# Altium PCB LKAS-EPS_PCB_V2I1.PcbDoc (part 1 of 2)
Units mil, origin at the board's own origin, x right, y up, seen from the top; angles counter-clockwise.
Board outline 1667 x 1739 mil, 2 copper layers (Top Layer, Bottom Layer); 50 components, 66 nets, 279 pads, 103 vias.
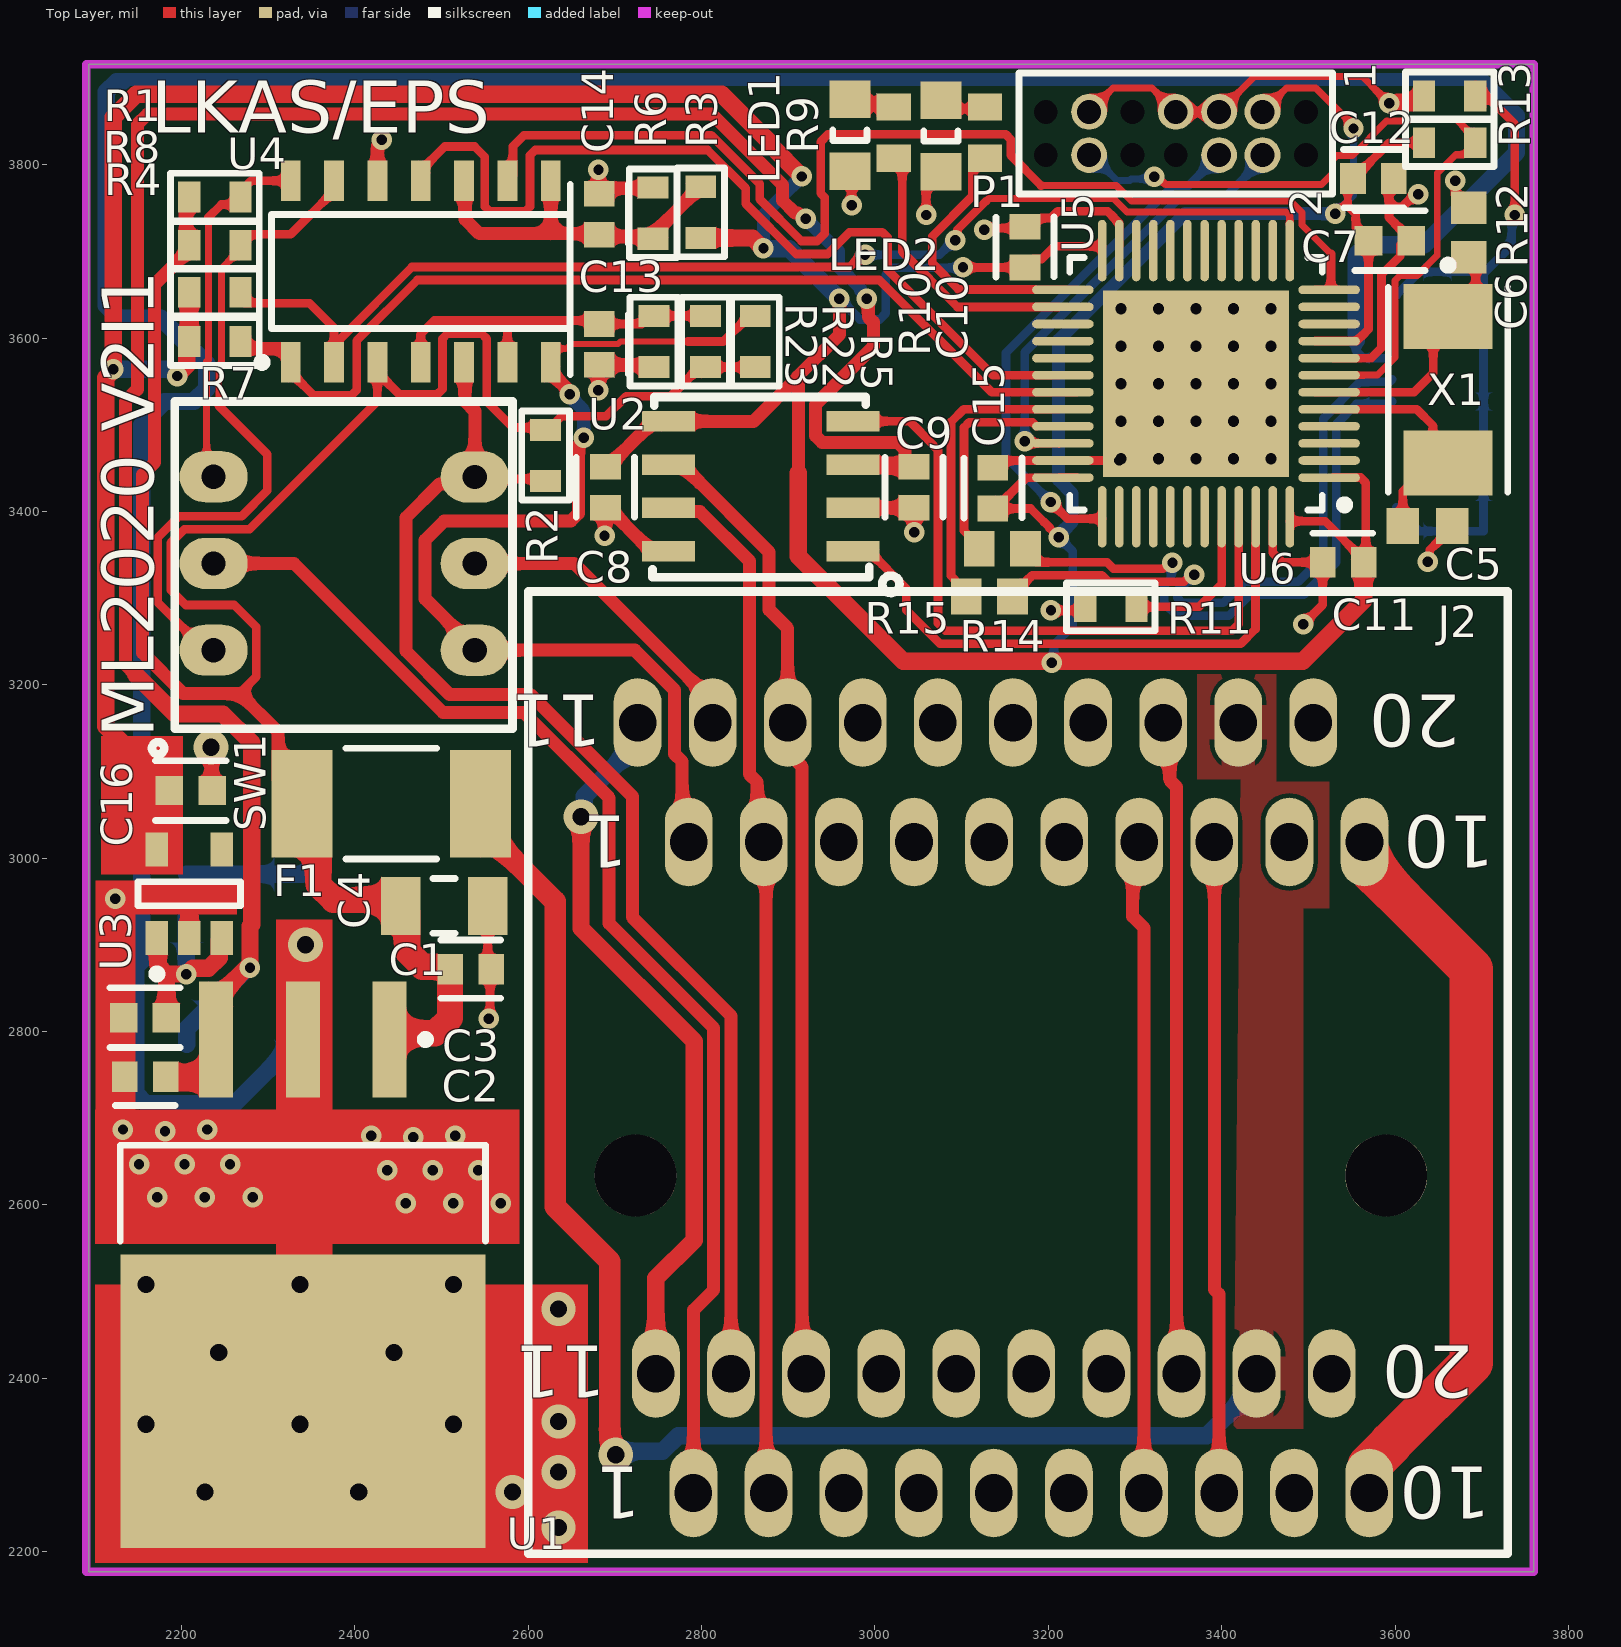
[diagram p0: Top Layer view]
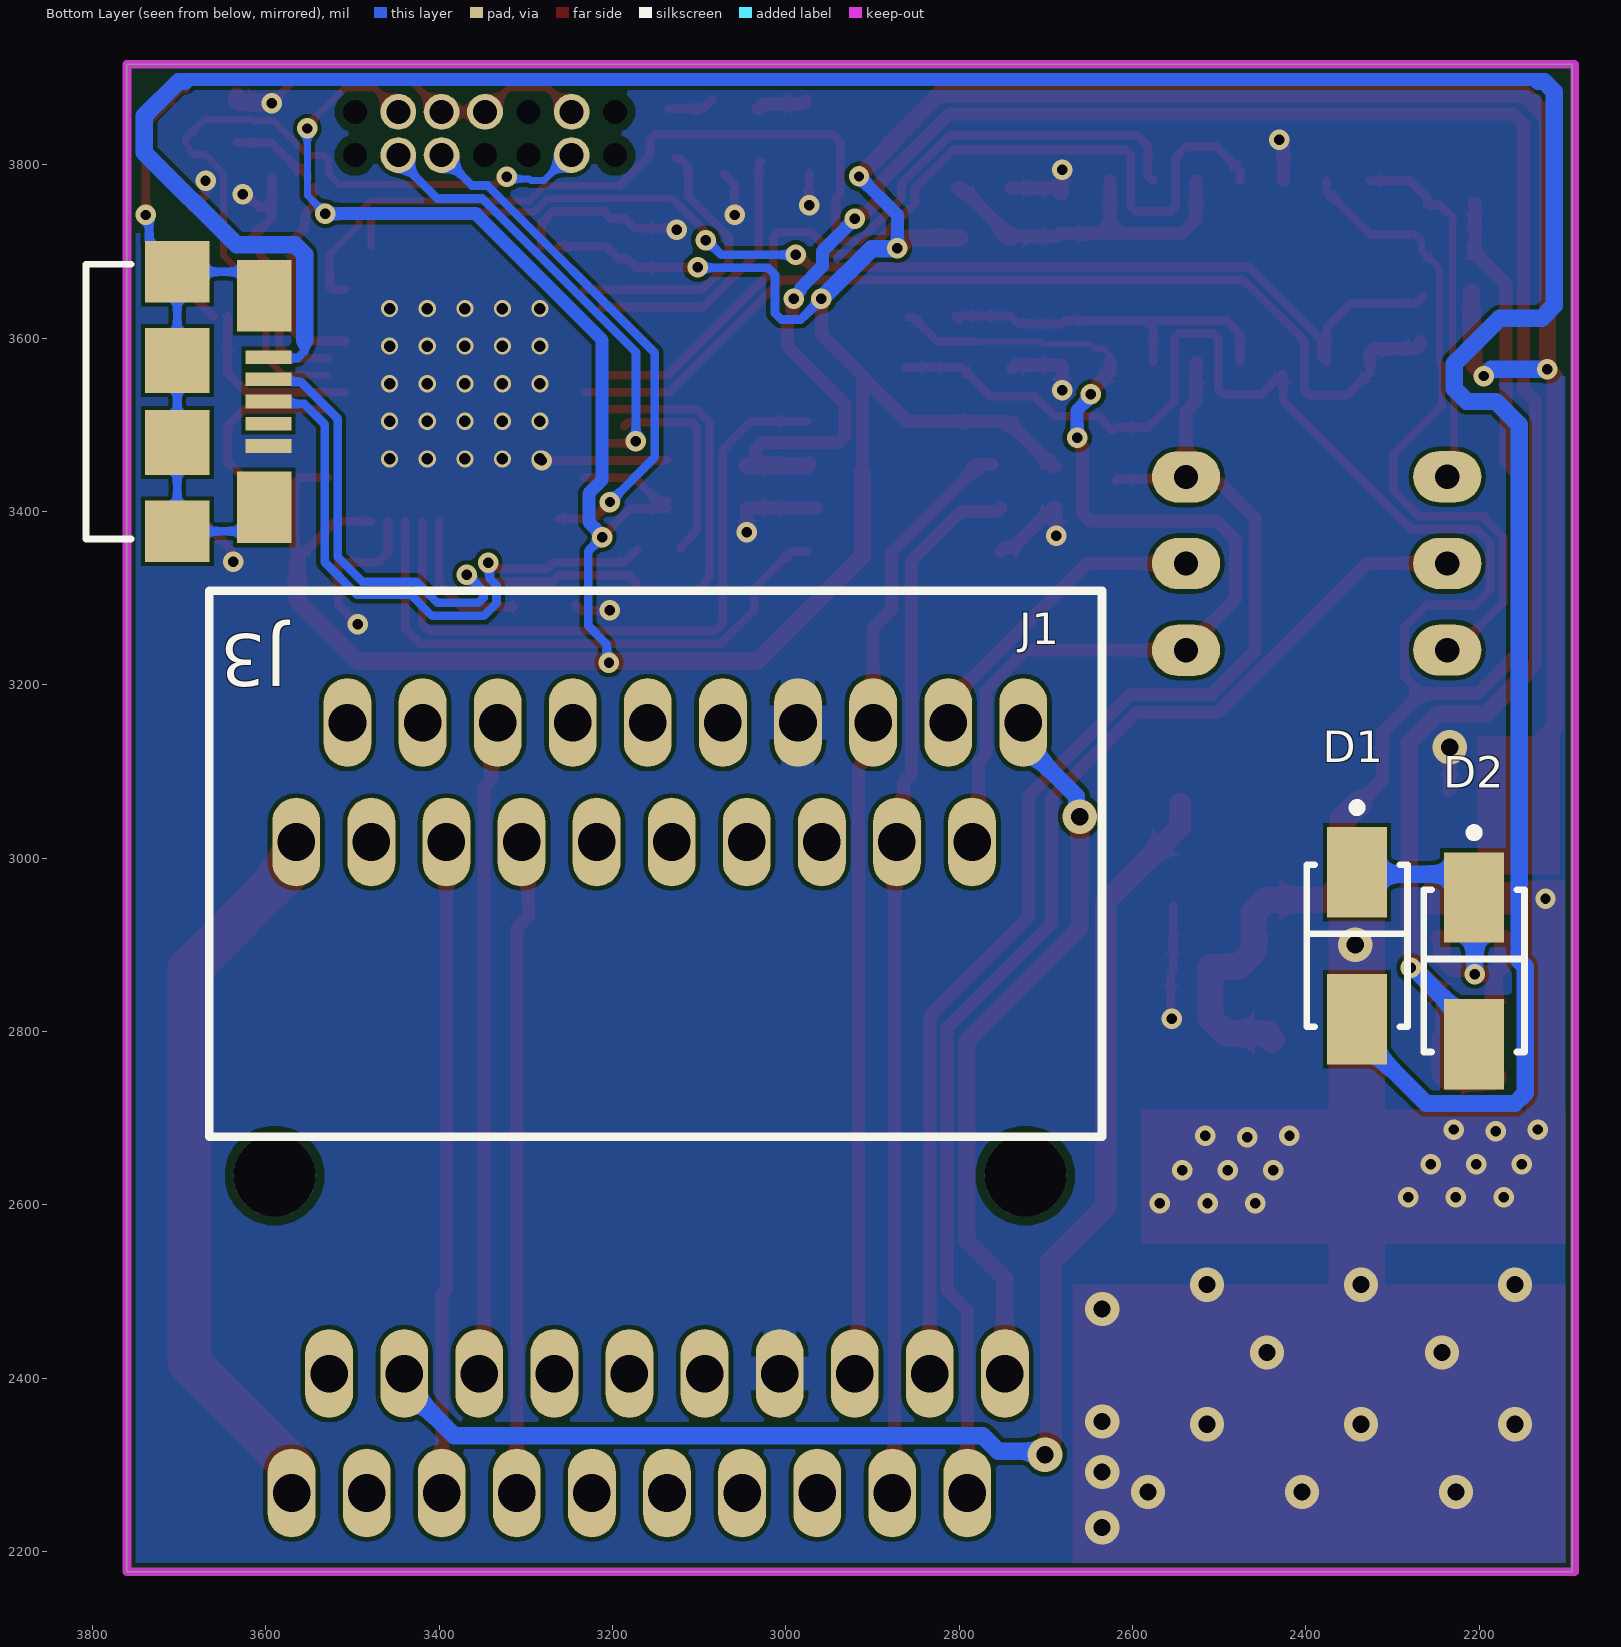
[diagram p1: Bottom Layer view, seen from below]

## Layer stack, top to bottom
Top Solder: solder mask 0.4, Solder Resist, Dk 3.5
Top Layer: signal copper 1.378
Dielectric1: dielectric 12.6, FR-4, Dk 4.8
Bottom Layer: signal copper 1.378
Bottom Solder: solder mask 0.4, Solder Resist, Dk 3.5

## Board outline
2093,2177 3760,2177 3760,3916 2093,3916

## Design rules (kind name [scope] priority, off if disabled: settings)
BoardOutlineClearance [All] p1: gap=7.87 ignorepadtopadclearanceinfootprint=FALSE
Clearance [All] p1: gap=5 ignorepadtopadclearanceinfootprint=FALSE except(9.84: Arc-Hole Track-Hole SMDPad-Hole THPad-Hole Via-Hole Fill-Hole Poly-Hole Region-Hole Text-Hole)
ComponentClearance [All] p1: gap=5 collisioncheckmode=3 verticalgap=5 showdistances=TRUE
DiffPairsRouting [All] p1: maxlimit=10 minlimit=5 mostfreqgap=5 toplayer_minwidth=5 toplayer_maxwidth=1000 toplayer_prefwidth=5 bottomlayer_minwidth=5 bottomlayer_maxwidth=1000 bottomlayer_prefwidth=5 maxuncoupledlength=500
Height [All] p1: minheight=0 maxheight=71497.94 prefheight=500
HoleSize [All] p1: absolutevalues=TRUE maxlimit=248.03 minlimit=11.81 maxpercent=80.000 minpercent=20.000
HoleToHoleClearance [All] p1: gap=9.84 allowstackedmicrovias=FALSE
MinimumAnnularRing [All] p1: minimumring=3
MinimumSolderMaskSliver [All] p1: minsoldermaskwidth=0
PlaneClearance [All] p1: clearance=5
PlaneConnect PlaneConnectPowerPads [InPadClass('PowerPads')] p1: planeconnectstyle=Direct reliefexpansion=20 reliefentries=4 reliefconductorwidth=10 reliefairgap=10
PlaneConnect [All] p2: pad.planeconnectstyle=Relief pad.reliefexpansion=11.81 pad.reliefentries=4 pad.reliefconductorwidth=39.37 pad.reliefairgap=5 via.planeconnectstyle=Direct via.reliefexpansion=11.81 via.reliefentries=4 via.reliefconductorwidth=5 via.reliefairgap=5
PolygonConnect PolygonConnectPowerPads [All vs (InPadClass('PowerPads'))] p1: connectstyle=Direct reliefconductorwidth=10 reliefentries=4 polygonreliefangle="90 Angle" airgapwidth=10
PolygonConnect [All] p2: thpad.connectstyle=Relief thpad.reliefconductorwidth=39.37 thpad.reliefentries=4 thpad.polygonreliefangle="90 Angle" thpad.airgapwidth=5 smdpad.connectstyle=Relief smdpad.reliefconductorwidth=39.37 smdpad.reliefentries=4 smdpad.polygonreliefangle="90 Angle" smdpad.airgapwidth=5 via.connectstyle=Direct via.reliefconductorwidth=5 via.reliefentries=4 via.polygonreliefangle="90 Angle" via.airgapwidth=5
RoutingVias [All] p1: holewidth=11.81 width=23.62 viastyle="Through Hole" minholewidth=11.81 minwidth=23.62 maxholewidth=100 maxwidth=259.84
SilkToSilkClearance [All] p1: silktosilkclearance=0
SilkToSolderMaskClearance [IsPad] p1: minsilkscreentomaskgap=5 clearancetoexposedcopper=TRUE
SolderMaskExpansion [All] p1: expansion=2.95 istentingtop=FALSE
Width [All] p1: maxlimit=1000 minlimit=5 preferedwidth=5 minimp=50.000000 maximp=50.000000 favimp=50.000000
20 further rules are at their usual default settings.

## Classes and differential pairs
differential pair USB_R: +USB_R_P -USB_R_N
differential pair USB: +USB_P -USB_N

## Components (designator, comment, footprint, x,y, rotation, side; value= is the part's Value field where it differs from the comment)
C1 "C0603C104M3RACTU" FP-C0603C-CF-MFG 2533.62,2872 r0 top value="0.10 μF"
C2 "C0603C104M3RACTU" FP-C0603C-CF-MFG 2158,2748 r180 top value="0.10 μF"
C3 "CL10B475KQ8NQNC" FP-CL10-IPC_C 2158,2816 r180 top value=4.7uF
C4 "CL31A106KBHNNNE" FP-CL31-IPC_C 2503,2945 r0 top value=10uF
C5 "GRM1885C1H220JA01D" CAPC1608X90X35ML10T15 3637.46,3383.34 r0 top
C6 "GRM1885C1H220JA01D" CAPC1608X90X35ML10T15 3685,3722 r90 top
C7 "CL10B475KQ8NQNC" FP-CL10-IPC_C 3593.94,3712.4 r0 top value=4.7uF
C8 "C0603C104M3RACTU" FP-C0603C-CF-MFG 2689,3428 r270 top value="0.10 μF"
C9 "C0603C104M3RACTU" FP-C0603C-CF-MFG 3045,3428 r270 top value="0.10 μF"
C10 "C0603C104M3RACTU" FP-C0603C-CF-MFG 3173,3705 r90 top value="0.10 μF"
C11 "C0603C104M3RACTU" FP-C0603C-CF-MFG 3540,3341.34 r180 top value="0.10 μF"
C12 "C0603C104M3RACTU" FP-C0603C-CF-MFG 3575,3784 r0 top value="0.10 μF"
C13 "C0603C104M3RACTU" FP-C0603C-CF-MFG 2682,3592.62 r270 top value="0.10 μF"
C14 "C0603C104M3RACTU" FP-C0603C-CF-MFG 2682,3743 r90 top value="0.10 μF"
C15 "C0603C104M3RACTU" FP-C0603C-CF-MFG 3136,3427 r90 top value="0.10 μF"
C16 "CL10B475KQ8NQNC" FP-CL10-IPC_C 2210.65,3078 r0 top value=4.7uF
D1 "SS14" FP-403AE-MFG 2341,2899 r90 bottom
D2 "SS14" FP-403AE-MFG 2206,2870 r90 bottom
F1 "1812L050/30PR" LFUS-1812L05030PR_V 2442,3063 r180 top
J1 "MX34020SF1" MX34020SF1 3555.16,3228.7 r180 bottom
J2 "MX34020NF1" MX34020NF1 3570.1,2267.72 r180 top
J3 "10118192-0001LF" FCI-10118192-0001LF-5_V 3702,3526.76 r270 bottom
LED1 "150080SS75000" 0805_A 2971,3834 r90 top
LED2 "150080BS75000" 0805_A 3076,3833 r90 top
P1 "62201421121" 62201421121 3347,3836 r180 top
R1 "4K7" R0603 2238.47,3762.67 r180 top
R2 "4K7" R0603 2620.01,3464.53 r90 top
R3 "4K7" R0603 2799,3745 r270 top
R4 "4K7" R0603 2238.47,3653.01 r180 top
R5 "4K7" R0603 2862,3596 r270 top
R6 "4K7" R0603 2744,3744 r270 top
R7 "4K7" R0603 2238.47,3596.01 r180 top
R8 "4K7" R0603 2238.47,3707 r180 top
R9 "RC0603FR-07560RL" RESC1608X55X25ML10T15 3021.71,3837 r90 top
R10 "RC0603FR-07560RL" RESC1608X55X25ML10T15 3127,3837 r90 top
R11 "4K7" R0603 3272,3290 r0 top
R12 "4K7" R0603 3663,3825.34 r180 top
R13 "4K7" R0603 3663,3879.34 r180 top
R14 "CRCW060322R0JNTA" RESC1609X50X30ML10T20 3132,3302 r0 top value=22R
R15 "CRCW060322R0JNTA" RESC1609X50X30ML10T20 3147,3357 r0 top value=22R
R22 "4K7" R0603 2804.54,3596 r270 top
R23 "4K7" R0603 2745.13,3596 r90 top
SW1 "76STC02T" 76STC02T 2387.66,3339.94 r90 top
U1 "UA7805CKTTR" KTT0003A_V 2340,2531 r270 top
U2 "MCP2562FD-E/SN" MCP2561 2868.3,3429 r180 top
U3 "MIC5504-3.3YM5-TR" FP-SOT23-5LD-PL-1-MFG 2209,2959 r90 top
U4 "LM339DR2G" ONSC-SOIC-14-751A-03_V 2476,3676.72 r90 top
U5 "STM32F103C6T7ATR" STM-LQFP48_L 3370.31,3547.34 r180 top
U6 "STM32F103C6U6A" STM-UFQFPN48_M 3370.31,3547.34 r180 top
X1 "ABM7-8.000MHZ-D2Y-T" ABRA-ABM7-2_V 3661,3540.34 r270 top

## Footprints (in the part's own frame and the unit in brackets; to place one, negate y for a bottom-side part, rotate by r counter-clockwise, add the part's x,y. Pads: shape width x height; smd on the part's side, far side on the other; paste and mask are expansions set on the pad)
76STC02T [mm] "Switch Rocker Arm"
  oval 1.5x2 hole 0.71: 1A(-2.538,3.827) 1B(-2.542,-3.827) 2A(2.542,3.827) 2B(2.538,-3.827) C1(0.002,3.827) C2(-0.002,-3.827)
  silkscreen extent -5.59,-4.93 4.75,5.63
0805_A [mm] "Chip LED, 2-Leads, Body 2.0x1.3mm, IPC Medium Density"
  rect 1.1x1.2 smd: 1(-1.05,0) 2(1.05,0)
  silkscreen extent -0.15,-0.5 0.15,0.5, body extent -1,-0.62 1,0.63, height 0.68
62201421121 [mm] "Pin Header, pitch 1.27 mm, THT, Vertical, dual row, 14p"
  round 0 hole 0.7 unplated: 1(-3.81,-0.635) 2(-3.81,0.635) 8(0,0.635) 9(1.27,-0.635) 10(1.27,0.635) 13(3.81,-0.635) 14(3.81,0.635)
  round 1.05 hole 0.7: 3(-2.54,-0.635) 4(-2.54,0.635) 5(-1.27,-0.635) 6(-1.27,0.635) 7(0,-0.635) 11(2.54,-0.635) 12(2.54,0.635)
  silkscreen extent -4.59,-1.78 4.59,1.78, body extent -4.44,-1.7 4.45,1.7, height 5.33
ABRA-ABM7-2_V [mm] "SMD, 2-Leads, Body 6x3.5mm"
  rect 1.9x2.6 smd: 1(-2.15,0) 2(2.15,0)
  silkscreen extent -3.77,-1.75 3,1.75, body extent -3,-1.75 3,1.75, height 1.4
CAPC1608X90X35ML10T15 [mm] "Chip Capacitor, 2-Leads, Body 1.7x0.9mm, IPC Low Density"
  rect 0.95x1.05 smd: 1(-0.725,0) 2(0.725,0)
  body extent -0.85,-0.45 0.85,0.45, height 0.9
FCI-10118192-0001LF-5_V [mm] "SMD, 5-Leads, Body 8.05x5.77mm, Pitch 0.65mm"
  rect 0.4x1.35 smd: 1(-1.3,2.675) 2(-0.65,2.675) 3(0,2.675) 4(0.65,2.675) 5(1.3,2.675)
  rect 2.1x1.6 smd: 6(-3.1,2.55) 7(3.1,2.55)
  rect 1.8x1.9 smd: 8(-3.8,0) 9(3.8,0)
  rect 1.9x1.9 smd: 10(-1.2,0) 11(1.2,0)
  silkscreen extent -4.03,-2.67 4.03,-1.35, body extent -4.03,-2.67 4.03,3.1, height 2.7
FP-403AE-MFG [mm]
  rect 2.65x1.75 smd paste+0 mask+0: 1(-2.15,0) 2(2.15,0)
  silkscreen extent -2.37,-1.48 4.17,1.48, body extent -2.6,-1.36 2.6,1.36, height 2.5
FP-C0603C-CF-MFG [mm]
  rect 0.75x0.9 smd paste+0 mask+0: 1(-0.6,0) 2(0.6,0)
  silkscreen extent -0.87,-0.85 0.88,0.85, body extent -1.2,-0.6 1.2,0.6, height 0.25
FP-CL10-IPC_C [mil]
  rect 31.73x33.79 smd paste+0 mask+0: 1(-24.65,0) 2(24.65,0)
  silkscreen extent -41,-34 41,34, body extent -44,-23 44,23, height 10
FP-CL31-IPC_C [mil]
  rect 45.45x67.17 smd: 1(-50.23,0) 2(50.23,0)
  silkscreen extent -13,-31 13,31, body extent -77,-39 77,39, height 10
FP-SOT23-5LD-PL-1-MFG [mm]
  rect 1x0.66 smd paste+0 mask+0: 1(-1.3,0.95) 2(-1.3,0) 3(-1.3,-0.95) 4(1.3,-0.95) 5(1.3,0.95)
  silkscreen extent -2.47,-1.5 0.35,1.5, body extent -1.9,-1.6 1.9,1.6, height 0.25
KTT0003A_V [mm] "DPAK, 3-Leads, Body 10.65x9.65mm, Pitch 2.54mm"
  rect 3.4x1 smd: 1(-6.6,2.54) 2(-6.6,0) 3(-6.6,-2.54)
  rect 8.6x10.7 smd: 4(4,0)
  silkscreen extent -6.72,-5.35 -0.7,5.35, body extent -6.68,-5.33 8.56,5.33, height 4.83
LFUS-1812L05030PR_V [mm] "SMD, 2-Leads, Body 4.55x3.24mm"
  rect 1.78x3.15 smd: 1(-2.615,0) 2(2.615,0)
  silkscreen extent -1.33,-1.62 1.33,1.62, body extent -2.27,-1.62 2.27,1.62, height 1
MCP2561 [mm] "SOIC 8 SN type"
  rect 1.55x0.6 smd: 1(-2.7,1.905) 2(-2.7,0.635) 3(-2.7,-0.635) 4(-2.7,-1.905) 5(2.7,-1.905) 6(2.7,-0.635) 7(2.7,0.635) 8(2.7,1.905)
  silkscreen extent -4.06,-2.62 3.17,3.12, body extent -3,-2.45 3,2.45, height 1.75
MX34020NF1 [mm] "Receptical with male pins"
  oval 1.4x2.6 hole 1.1: 1(19.8,0) 2(17.6,0) 3(15.4,0) 4(13.2,0) 5(11,0) 6(8.8,0) 7(6.6,0) 8(4.4,0) 9(2.2,0) 10(0,0) 11(20.9,-3.5) 12(18.7,-3.5) 13(16.5,-3.5) 14(14.3,-3.5) 15(12.1,-3.5) 16(9.9,-3.5) 17(7.7,-3.5) 18(5.5,-3.5) 19(3.3,-3.5) 20(1.1,-3.5)
  round 2.4 hole 2.4 unplated: ""(-0.5,-9.3) ""(21.5,-9.3)
  silkscreen extent -4.06,-26.42 24.64,1.78, body extent -3.56,-26.21 24.34,0.31, height 16
MX34020SF1 [mm] "Plug without pins"
  oval 1.4x2.6 hole 1.1: 1(19.558,-5.334) 2(17.358,-5.334) 3(15.158,-5.334) 4(12.958,-5.334) 5(10.758,-5.334) 6(8.558,-5.334) 7(6.358,-5.334) 8(4.158,-5.334) 9(1.958,-5.334) 10(-0.242,-5.334) 11(21.058,-1.834) 12(18.858,-1.834) 13(16.658,-1.834) 14(14.458,-1.834) 15(12.258,-1.834) 16(10.058,-1.834) 17(7.858,-1.834) 18(5.658,-1.834) 19(3.458,-1.834) 20(1.258,-1.834)
  silkscreen extent -2.79,-13.97 23.37,2.03, body extent -2.39,-13.75 22.71,1.45, height 21
ONSC-SOIC-14-751A-03_V [mm] "SOIC, 14-Leads, Body 8.75x4mm, Pitch 1.27mm"
  rect 1.18x0.58 smd: 1(-2.66,3.81) 2(-2.66,2.54) 3(-2.66,1.27) 4(-2.66,0) 5(-2.66,-1.27) 6(-2.66,-2.54) 7(-2.66,-3.81) 8(2.66,-3.81) 9(2.66,-2.54) 10(2.66,-1.27) 11(2.66,0) 12(2.66,1.27) 13(2.66,2.54) 14(2.66,3.81)
  silkscreen extent -2.78,-4.37 1.67,4.77, body extent -2,-4.38 2,4.38, height 1.75
R0603 [mm]
  rect 0.65x0.9 smd: 1(-0.75,0) 2(0.75,0)
  silkscreen extent -1.3,-0.7 1.3,0.7, body extent -1.05,-0.4 1.05,0.4, height 0.5
RESC1608X55X25ML10T15 [mm] "Chip Resistor, 2-Leads, Body 1.70x0.90mm, IPC Low Density"
  rect 0.8x1 smd: 1(-0.75,0) 2(0.75,0)
  body extent -0.85,-0.45 0.85,0.45, height 0.55
RESC1609X50X30ML10T20 [mm] "Chip Resistor, 2-Leads, Body 1.55x0.85mm, IPC Low Density"
  rect 0.9x1.05 smd: 1(-0.675,0) 2(0.675,0)
  body extent -0.82,-0.48 0.82,0.48, height 0.5
STM-LQFP48_L [mm] "QFP, 48-Leads, Body 7x7mm, Pitch 0.5mm, IPC High Density"
  oval 1.55x0.25 smd: 1(-4.025,2.75) 2(-4.025,2.25) 3(-4.025,1.75) 4(-4.025,1.25) 5(-4.025,0.75) 6(-4.025,0.25) 7(-4.025,-0.25) 8(-4.025,-0.75) 9(-4.025,-1.25) 10(-4.025,-1.75) 11(-4.025,-2.25) 12(-4.025,-2.75) 25(4.025,-2.75) 26(4.025,-2.25) 27(4.025,-1.75) 28(4.025,-1.25) 29(4.025,-0.75) 30(4.025,-0.25) 31(4.025,0.25) 32(4.025,0.75) 33(4.025,1.25) 34(4.025,1.75) 35(4.025,2.25) 36(4.025,2.75)
  oval 0.25x1.55 smd: 13(-2.75,-4.025) 14(-2.25,-4.025) 15(-1.75,-4.025) 16(-1.25,-4.025) 17(-0.75,-4.025) 18(-0.25,-4.025) 19(0.25,-4.025) 20(0.75,-4.025) 21(1.25,-4.025) 22(1.75,-4.025) 23(2.25,-4.025) 24(2.75,-4.025) 37(2.75,4.025) 38(2.25,4.025) 39(1.75,4.025) 40(1.25,4.025) 41(0.75,4.025) 42(0.25,4.025) 43(-0.25,4.025) 44(-0.75,4.025) 45(-1.25,4.025) 46(-1.75,4.025) 47(-2.25,4.025) 48(-2.75,4.025)
  body extent -3.5,-3.5 3.5,3.5, height 1.6
STM-UFQFPN48_M [mm] "QFN, 48-Leads, Body 7.1x7.1mm, Pitch 0.5mm, Thermal Pad 5.6x5.6mm, IPC Low Density"
  oval 1x0.25 smd: 1(-3.5,2.75) 2(-3.5,2.25) 3(-3.5,1.75) 4(-3.5,1.25) 5(-3.5,0.75) 6(-3.5,0.25) 7(-3.5,-0.25) 8(-3.5,-0.75) 9(-3.5,-1.25) 10(-3.5,-1.75) 11(-3.5,-2.25) 12(-3.5,-2.75) 25(3.5,-2.75) 26(3.5,-2.25) 27(3.5,-1.75) 28(3.5,-1.25) 29(3.5,-0.75) 30(3.5,-0.25) 31(3.5,0.25) 32(3.5,0.75) 33(3.5,1.25) 34(3.5,1.75) 35(3.5,2.25) 36(3.5,2.75)
  oval 0.25x1 smd: 13(-2.75,-3.5) 14(-2.25,-3.5) 15(-1.75,-3.5) 16(-1.25,-3.5) 17(-0.75,-3.5) 18(-0.25,-3.5) 19(0.25,-3.5) 20(0.75,-3.5) 21(1.25,-3.5) 22(1.75,-3.5) 23(2.25,-3.5) 24(2.75,-3.5) 37(2.75,3.5) 38(2.25,3.5) 39(1.75,3.5) 40(1.25,3.5) 41(0.75,3.5) 42(0.25,3.5) 43(-0.25,3.5) 44(-0.75,3.5) 45(-1.25,3.5) 46(-1.75,3.5) 47(-2.25,3.5) 48(-2.75,3.5)
  rect 5.461x5.461 smd: 49(0,0)
  silkscreen extent -4.48,-3.7 3.7,3.7, body extent -3.55,-3.55 3.55,3.55, height 0.6

## Part data
C1 C2 C8 C9 C10 C11 C12 C13 C14 C15: library part CMP-2006-03065-2, "CAP CER 0.1UF 25V X7R 0603", Capacitance="0.1 μF", Manufacturer=KEMET, Package=C0603C-CF, Temperature="-55°C to +125°C", Temperature Characteristic=X7R, Temperature Coefficient=30ppm/°C, Temperature Range High=+125°C, Temperature Range Low=-55°C, Tolerance=0.2, Voltage Rating="25 V", Automotive=Yes, Automotive Grade="Grade 1", Category=Cap, ComponentLink2Description=Datasheet, ComponentLink2URL=https://api.kemet.com/component-edge/download/datasheet/C0603C100J5GACAUTO.pdf, Device Class L1="Passive Components", Device Class L2=Capacitors, Device Class L3="Ceramic Capacitors", Digikey Description="CAP CER 0.1UF 25V X7R 0603", Height=0.87mm, Lead Free=Yes, Manufacturer Part Number=C0603C104M3RACTU, Material=Ceramic, Mouser Description="Multilayer Ceramic Capacitors MLCC - SMD/SMT 25volts 0.1uF X7R 20%", Octopart=https://octopart.com/c0603c104m3ractu-kemet-95914, RoHS=TRUE
C3 C7 C16: library part CMP-2000-06096-2, "CAP CER 4.7UF 6.3V X7R 0603", Capacitance=4.7uF, Manufacturer=Samsung, Package=CL10, Temperature="-55°C to +125°C", Temperature Characteristic=X7R, Temperature Coefficient=15%, Temperature Range High=+125°C, Temperature Range Low=-55°C, Tolerance=10%, Voltage Rating=6.3V, Automotive=No, Category=Cap, ComponentLink2Description=Datasheet, ComponentLink2URL=http://www.samsungsem.com/kr/support/product-search/mlcc/__icsFiles/afieldfile/2018/07/24/CL10B475KQ8NQNC.pdf, Device Class L1="Passive Components", Device Class L2=Capacitors, Device Class L3="Ceramic Capacitors", Digikey Description="CAP CER 4.7UF 6.3V X7R 0603", Height=0.95mm, Ipc Land Pattern Name=CAPC16080X80, Lead Free=Yes, Manufacturer Part Number=CL10B475KQ8NQNC, Material=Ceramic, Mouser Description="C Series 0402 4.7 uF 6.3 V ±20 % Tolerance X5R SMT Multilayer Ceramic Capacitor", Octopart=https://octopart.com/cl10b475kq8nqnc-samsung-24957976, RoHS=TRUE
C4: library part CMP-13271-000016-1, "CAP CER 10UF 50V X5R 1206", Capacitance=10uF, Manufacturer=Samsung, Package=CL31, Temperature="-55°C to +85°C", Temperature Characteristic=X5R, Temperature Coefficient=15%, Temperature Range High=+85°C, Temperature Range Low=-55°C, Tolerance=10%, Voltage=50V, Automotive=No, Category=Cap, ComponentLink2Description=Datasheet, ComponentLink2URL=http://www.samsungsem.com/kr/support/product-search/mlcc/__icsFiles/afieldfile/2018/06/21/CL31A106KBHNNNE.pdf, Device Class L1="Passive Components", Device Class L2=Capacitors, Device Class L3="Ceramic Capacitors", Digikey Description="CAP CER 10UF 50V X5R 1206", Height=1.8mm, Ipc Land Pattern Name=CAPC320160X160, Lead Free=Yes, Manufacturer Part Number=CL31A106KBHNNNE, Material=Ceramic, Octopart=https://octopart.com/cl31a106kbhnnne-samsung-19832778, RoHS=TRUE, Voltage Rating=50V
C5 C6: library part CMP-2000-04945-1, "Chip Capacitor, 22 pF, +/- 5%, 50 V, -55 to 125 degC, 0603 (1608 Metric), RoHS, Tape and Reel", Capacitance=22pF, Case Size/Dimension=0603, Dielectric=C0G, Manufacturer=Murata, Package Description="2-Pin Surface Mount Device, Body 1.6 x 0.8 mm", Package Reference=603, Rated Voltage=50V, Tolerance (%)=±5%, Datasheet URL=https://datasheet.ciiva.com/11786/0900766b807a1cab-11786398.pdf, Datasheet Version=Jul-06, Manufacturer URL=http://www.murata.com/
D1 D2: library part CMP-2000-04943-2, "DIODE SCHOTTKY 40V 1A SMA", Forward Current=1A, Manufacturer="ON Semiconductor", Max Junction Temp=+125°C, Max Repetitive Reverse Voltage=40V, Max Surge Forward Current=40A, Package=403AE, Peak Reverse Current=0.2mA, Temperature="-65°C to +125°C", Temperature Range Low=-65°C, Automotive=No, Category=Diode, ComponentLink2Description=Datasheet, ComponentLink2URL=https://www.onsemi.com/pub/Collateral/SS19-D.PDF, Device Class L1="Discrete Semiconductors", Device Class L2=Diodes, Device Class L3="Schottky Diodes", Digikey Description="DIODE SCHOTTKY 40V 1A SMA", Height=2.5mm, Lead Free=Yes, Manufacturer Part Number=SS14, Mouser Description="Schottky Diodes & Rectifiers SMA 40V 1.0A", Octopart=https://octopart.com/ss14-on+semiconductor-29205033, RoHS=TRUE, Standoff Height=0.05mm, Temperature Range High=+125°C
F1: library part CMP-2000-05508-1, "PTC Resettable Fuse, 0.8 W, 30 V, -40 to 85 degC, 2-Pin SMD, RoHS, Tape and Reel", Current - Hold (Ih) (Max)=500mA, Current - Max=100A, Current - Trip (It)=1A, Manufacturer=Littelfuse-Inc., Package / Case=1812(4532Metric),Concave, Package Description="2-Pin Surface Mount Device, Body 4.55 x 3.24 mm", Package Reference=1812, Voltage - Max=30V, Category=CircuitProtection, Datasheet URL=http://www.littelfuse.com/~/media/electronics/datasheets/resettable_ptcs/littelfuse_ptc_1812l_datasheet.pdf.pdf, Datasheet Version=02/2016, Family=PTCResettableFuses, Manufacturer URL=http://www.littelfuse.com/, Mounting Technology=SurfaceMount, Packaging=Tape&Reel(TR), R Min/Max=0.150~1.000Ohm, Series=POLY-FUSE®,1812L, Time to Trip=0.15s
J1: "Automotive Connectors Sckt HOUSING 20P", Color=Grey, Current Rating=3A, Manufacturer="JAE Electronics", Max Operating Temperature=85°C, Min Operating Temperature=-40°C, Package Quantity=192, Supplier Part Number 1=670-2925-ND, Category=Connectors, ComponentLink1Description=https://datasheet.ciiva.com/11742/0900766b80fc15d5-11742077.pdf?src-supplier=RSComponents, ComponentLink1URL=https://datasheet.ciiva.com/11742/0900766b80fc15d5-11742077.pdf?src-supplier=RSComponents, ComponentLink2Description=https://datasheet.ciiva.com/4553/sj038752-64597-4553699.pdf?src-supplier=Mouser, ComponentLink2URL=https://datasheet.ciiva.com/4553/sj038752-64597-4553699.pdf?src-supplier=Mouser, ComponentLink3Description=https://datasheet.ciiva.com/6739/614004-6739335.pdf?src-supplier=Newark, ComponentLink3URL=https://datasheet.ciiva.com/6739/614004-6739335.pdf?src-supplier=Newark, ComponentLink4Description=https://datasheet.ciiva.com/762/transportation-pg-v2-2-762885.pdf?src-supplier=Digi-Key, ComponentLink4URL=https://datasheet.ciiva.com/762/transportation-pg-v2-2-762885.pdf?src-supplier=Digi-Key, ComponentLink5Description=https://datasheet.ciiva.com/5821/1009688-5821398.pdf?src-supplier=Farnell, ComponentLink5URL=https://datasheet.ciiva.com/5821/1009688-5821398.pdf?src-supplier=Farnell, ComponentLink6Description=https://datasheet.ciiva.com/7648/1009712-7648886.pdf?src-supplier=Element14, ComponentLink6URL=https://datasheet.ciiva.com/7648/1009712-7648886.pdf?src-supplier=Element14, Connector Type=Receptacle,Socket,Rectangular, Contact Material="Copper Alloy,Copper", Contact Plating=Tin, Depth=21.3mm, Gender=Female, Height=14mm, Housing Material=PPE, Manufacturer Part Number=MX34020SF1, Mount="Free Hanging,Cable", Number of Contacts=20, Number of Positions=20, Number of Rows=2, Packaging=Tray, Pitch=0.087inch, Pricing 1="1=0.73000, 10=0.63800, 25=0.60000, 50=0.57500, 100=0.55000, 250=0.50000, 576=0.45000, 1152=0.40000, 2880=0.36250 (USD)", RoHS=Yes, Row Spacing=0.118inch, Stock 1=3393, Supplier 1=Digi-Key, Termination=Crimp, Width=25.1mm
J2: "JAE MX34 Series, 2.2mm Pitch 20 Way 2 Row Right Angle PCB Header, Solder Termination, 3A", Color=Grey, Current Rating=3A, Manufacturer="JAE Electronics", Package Quantity=288, Supplier Part Number 1=670-2924-ND, Category=Connectors, ComponentLink1Description=https://datasheet.ciiva.com/7621/1009688-7621584.pdf?src-supplier=Element14, ComponentLink1URL=https://datasheet.ciiva.com/7621/1009688-7621584.pdf?src-supplier=Element14, ComponentLink2Description=https://datasheet.ciiva.com/4554/sj038751-3818-4554108.pdf?src-supplier=Mouser, ComponentLink2URL=https://datasheet.ciiva.com/4554/sj038751-3818-4554108.pdf?src-supplier=Mouser, ComponentLink3Description=https://datasheet.ciiva.com/11754/0900766b80ddc6f0-11754159.pdf?src-supplier=RSComponents, ComponentLink3URL=https://datasheet.ciiva.com/11754/0900766b80ddc6f0-11754159.pdf?src-supplier=RSComponents, ComponentLink4Description=https://datasheet.ciiva.com/732/transportation-pg-v2-2-732931.pdf?src-supplier=Digi-Key, ComponentLink4URL=https://datasheet.ciiva.com/732/transportation-pg-v2-2-732931.pdf?src-supplier=Digi-Key, Connector Type="Male Pin,Rectangular", Contact Material=Brass, Contact Mating Length=0.303inch, Contact Plating=Tin, Gender=Male, Manufacturer Part Number=MX34020NF1, Mount="Through Hole", Number of Contacts=20, Number of Positions=20, Number of Rows=2, Orientation="Right Angle", Packaging=Rail/Tube, Pitch=0.087inch, Pricing 1="1=1.57000, 10=1.42100, 100=1.21800, 500=1.01500, 1000=0.87000, 5000=0.77140, 10000=0.75400 (USD)", REACH SVHC="No SVHC", RoHS=Yes, Row Spacing=0.118inch, Stock 1=10297, Supplier 1=Digi-Key, Termination=Solder
J3: library part CMP-2000-05118-1, "Micro USB B Type Receptacle, -55 to 85 degC, 5-Pin SMD, RoHS, Tape and Reel", Color=Black, Current Rating=1.8A, Flammability Rating=UL94V-0, Insulation Resistance=1000MOhms, Manufacturer=FCI, Operating Temperature Range=-55Cto+85C, Brand=FCI, Connector Type=MicroUSBTypeBreceptacle, Contact Material=CopperAlloy, Contact Plating=Gold, Datasheet URL=http://www.mouser.com/ds/2/154/10118192-793027.pdf, Datasheet Version="Rev. B, 05/2015", Factory Pack Quantity=1400, Gender=Female, Manufacturer URL=http://www.fci.com/, Mounting Angle=Right, Number of Contacts=5Contact, Packaging=Reel, Product=MicroUSBTypeBConnectors, Product Category=USBConnectors, RoHS=Details, Standard=USB2.0, Termination Style=SMD/SMT
LED1: library part CMP-1426-00010-1, "SMD mono-color Chip LED, WL-SMCW, Super Red", Color="Super Red", Manufacturer="Wuerth Elektronik", ComponentLink1Description="Manufacturer URL", ComponentLink1URL=http://www.we-online.com, ComponentLink2Description=Datasheet, ComponentLink2URL=http://katalog.we-online.com/led/datasheet/150080SS75000.pdf, PackageReference=0805_A, PartNumber=150080SS75000
LED2: library part CMP-1426-00008-1, "SMD mono-color Chip LED, WL-SMCW, Blue", Color=Blue, Manufacturer="Wuerth Elektronik", ComponentLink1Description="Manufacturer URL", ComponentLink1URL=http://www.we-online.com, ComponentLink2Description=Datasheet, ComponentLink2URL=http://katalog.we-online.com/led/datasheet/150080BS75000.pdf, PackageReference=0805_A, PartNumber=150080BS75000
P1: library part CMP-1502-00949-1, "THT Vertical Pin Header WR-PHD, Pitch 1.27 mm, Dual Row, 14 pins", Contact Resistance=20mOhm, Manufacturer="Wurth Elektronik", Operating Temperature=-40to105degC, Rated current=1A, Withstanding Voltage=500VAC, Working Voltage=100VAC, Datasheet URL=https://katalog.we-online.de/em/datasheet/62201421121.pdf, Gender=Male, Manufacturer URL=http://www.we-online.de, Mounting Technology=THT, Orientation=Vertical, Package Reference=62201421121, Packaging=Box, Part Number=62201421121, Pin Number=14, Pitch=1.27mm, Publisher=WurthElektronik, Row Number=Dual
R1 R2 R3 R4 R5 R6 R7 R8 R11 R12 R13 R22 R23: library part RMCF0603FT4K70, "Res Thick Film 0603 4.7K Ohm 1% 1/10W 100ppm/C Molded SMD SMD Paper T/R", Case Code (Imperial)=0603, Case Code (Metric)=1608, Manufacturer="Stackpole Electronics", Max Operating Temperature=155°C, Max Power Dissipation=100mW, Min Operating Temperature=-55°C, Resistance=4.7kR, Resistor Type="Thick Film", Supplier Part Number 1=RMCF0603FT4K70CT-ND, Temperature Coefficient=100ppm/°C, Tolerance=1%, Case/Package=0603, Category="Chip SMD Resistors", ComponentLink1Description=https://datasheet.ciiva.com/26835/getdatasheetpartid-486078-26835642.pdf?src-supplier=Verical, ComponentLink1URL=https://datasheet.ciiva.com/26835/getdatasheetpartid-486078-26835642.pdf?src-supplier=Verical, Contact Plating=Tin,Matte, Depth=0.8mm, Features="Automotive AEC-Q200", Height=0.022inch, Lead Free="Lead Free", Length=1.55mm, Manufacturer Part Number=RMCF0603FT4K70, Military Standard=Not, Mount="Surface Mount", Number of Terminations=2, Packaging="Tape and Reel", Power Rating=100mW, Pricing 1="1=0.10000, 10=0.01500, 100=0.00590, 1000=0.00265, 2500=0.00230 (USD)", Radiation Hardening=No, RoHS=Yes, Stock 1=1530231, Supplier 1=Digi-Key, Width=0.031inch
R9 R10: library part CMP-1659-00038-1, "Chip Resistor, 560 Ohm, +/- 1%, 0.1 W, -55 to 155 degC, 0603 (1608 Metric), RoHS, Tape and Reel", Case Code (Imperial)=0603, Case Code (Metric)=1608, Max Operating Temperature="155 degC", Min Operating Temperature="-55 degC", Power Rating="100 mW", Resistance=560R, Tolerance=1%, Voltage Rating="50 V", Case\Package=0603, ComponentLink1Description="Manufacturer URL", ComponentLink1URL=http://www.yageo.com/, ComponentLink2Description=Datasheet, ComponentLink2URL=http://www.yageo.com/documents/recent/PYu-RC_Group_51_RoHS_L_04.pdf, DatasheetVersion="Rev. 4, 02/2016", Height="0.45 mm", Length="1.6 mm", Mount="Surface Mount", PackageDescription="2-Pin Surface Mount Device, Body 1.6 x 0.8 mm", PackageReference=0603, Packaging="Tape and Reel", Pins=2, REACH SVHC="No SVHC", RoHSCompliant=true, Voltage Rating (DC)="50 V", Width="0.8 mm"
R14 R15: library part CMP-2000-03099-1, Manufacturer="Vishay Dale", Part Number=CRCW060322R0JNTA
SW1: "SWITCH TOGGLE DIP SPDT 150MA 30V / WIRED: / 1  2  3 / 4  5  6", Contact Current Rating=150mA, Manufacturer=Grayhill, Max Operating Temperature=85°C, Max Voltage Rating (DC)=30V, Min Operating Temperature=-40°C, Package Quantity=13, Supplier Part Number 1=GH7721-ND, Actuator Length=5.08mm, Actuator Type=Toggle, Body Material=Thermoplastic, Category="DIP Switches", ComponentLink1Description=https://datasheet.ciiva.com/16198/dip-series-76-and-78-spdt-16198550.pdf?src-supplier=Onlinecomponents.com, ComponentLink1URL=https://datasheet.ciiva.com/16198/dip-series-76-and-78-spdt-16198550.pdf?src-supplier=Onlinecomponents.com, ComponentLink2Description=https://datasheet.ciiva.com/2865/dip-series-76-and-78-spdt-2865964.pdf?src-supplier=Digi-Key, ComponentLink2URL=https://datasheet.ciiva.com/2865/dip-series-76-and-78-spdt-2865964.pdf?src-supplier=Digi-Key, Contact Material="Copper Alloy,Gold", Contact Plating=Gold, Current Rating=150mA, Depth=9.65mm, Electrical Life=2000Cycles, Lead Free="Lead Free", Length=0.78inch, Manufacturer Part Number=76STC02T, Max Current Rating=150mA, Mechanical Life=2000Cycles, Mount="Through Hole,PCB", Number of Circuits=4, Number of Positions=4, Orientation=Straight, Packaging=Rail/Tube, Pitch=0.1inch, Pricing 1="1=4.74000, 10=4.54200, 25=4.14720, 100=3.59410, 250=3.25836, 500=3.02140, 1000=2.80417, 2500=2.54745, 5000=2.36972 (USD)", Radiation Hardening=No, REACH SVHC="No SVHC", RoHS=Yes, Stock 1=149, Supplier 1=Digi-Key, Termination="PC Pins", Throw Configuration=SPDT, Voltage Rating=30V, Voltage Rating (DC)=30V, Washable=No
U1: library part CMP-1685-00014-1, "Fixed Positive Voltage Regulator, 7 to 25 V, 1.5 A, 0 to 125 degC, 3-Pin DDPAK (KTT), Green (RoHS / & no Sb/Br), Tape and Reel", Case Code (Imperial)=0603, Case Code (Metric)=1608, Max Operating Temperature="155 degC", Min Operating Temperature="-55 degC", Package Quantity=5000, Power Rating="100 mW", Resistance="220 Ohm", Tolerance=1%, Voltage Rating="50 V", Case\Package=0603, Code_JEDEC=TO-263, ComponentLink1Description="Manufacturer URL", ComponentLink1URL=http://www.ti.com/, ComponentLink2Description=Datasheet, ComponentLink2URL=http://www.ti.com/lit/ds/symlink/ua7805.pdf, DatasheetVersion="SLVS056P, 01/2015", Height="0.45 mm", Length="1.6 mm", Mount="Surface Mount", PackageDescription="3-Pin Surface Mount Device, Body 10.16 x 9.015 mm, Pitch 2.54 mm", PackageReference=KTT0003A, Packaging="Tape and Reel", Pins=2, REACH SVHC="No SVHC", RoHSCompliant=true, Voltage Rating (DC)="50 V", Width="0.8 mm"
U2: "8 SOIC 3.90mm(.150in) TUBECAN Flexible Data Rate Transceiver", Manufacturer=Microchip, Supplier Part Number 1=MCP2562FD-E/SN-ND, Category="Interface ICs", ComponentLink1Description=https://datasheet.ciiva.com/46406/1821190-46406053.pdf?src-supplier=Element14, ComponentLink1URL=https://datasheet.ciiva.com/46406/1821190-46406053.pdf?src-supplier=Element14, ComponentLink2Description=https://datasheet.ciiva.com/48512/mcp2562fd-e-mf-eng-tds-48512074.pdf?src-supplier=Distrelec, ComponentLink2URL=https://datasheet.ciiva.com/48512/mcp2562fd-e-mf-eng-tds-48512074.pdf?src-supplier=Distrelec, ComponentLink3Description=https://datasheet.ciiva.com/48473/20005284a-48473180.pdf?src-supplier=Avnet, ComponentLink3URL=https://datasheet.ciiva.com/48473/20005284a-48473180.pdf?src-supplier=Avnet, ComponentLink4Description=https://datasheet.ciiva.com/46406/1821190-46406061.pdf?src-supplier=Element14, ComponentLink4URL=https://datasheet.ciiva.com/46406/1821190-46406061.pdf?src-supplier=Element14, Manufacturer Part Number=MCP2562FD-E/SN, Pricing 1="1=0.96000, 25=0.80000, 100=0.73000 (USD)", RoHS=Yes, Stock 1=1433, Supplier 1=Digi-Key
U3: library part CMP-2000-07604-2, "IC REG LINEAR 3.3V 300MA SOT23-5", Case/Package=SOT-23-5, Dropout Voltage=380mV, Max Input Voltage=5.5V, Max Operating Temperature=125°C, Max Output Current=300mA, Min Input Voltage=2.5V, Min Operating Temperature=-40°C, Nominal Output Voltage=3.3V, Operating Supply Current=42uA, Power Supply Rejection Ratio (PSRR)=60dB, Quiescent Current=38uA, Accuracy=3%, Height=1.1mm, Length=2.9mm, Mount="Surface Mount", Number of Outputs=1, Number of Pins=5, Output Current=300mA, Output Type=Fixed, Output Voltage=3.3V, Packaging="Tape and Reel", REACH SVHC="No SVHC", Width=1.6mm
U4: library part CMP-1305-00036-1, "Single Supply Quad Comparators, 0 to 70 degC, 14-Pin SOIC, Pb-Free, Tape and Reel", Manufacturer="On Semiconductor", ComponentLink1Description="Manufacturer URL", ComponentLink1URL=http://www.onsemi.com/, ComponentLink2Description=Datasheet, ComponentLink2URL=http://www.onsemi.com/pub_link/Collateral/LM339-D.PDF, ComponentLink3Description="Package Specification", ComponentLink3URL=http://www.onsemi.com/pub_link/Collateral/751A-03.PDF, DatasheetVersion="Rev. 20", IO Typ (mA)=16, Mounting Technology="Surface Mount", PackageDescription="14-Pin Small Outline Integrated Circuit, Body 8.65 x 3.9 mm, Pitch 1.27 mm", PackageReference=SOIC-14-751A-03, PackageVersion="Rev. K, 05/2011", Packing="Tape and Reel", PartNumber=LM339DR2G, RoHS=TRUE
U5: library part CMP-0237-00257-3, "ARM Cortex-M3 32-bit MCU, 32 KB Flash, 10 KB Internal RAM, 37 I/Os, 48-pin LQFP, -40 to 105 degC, Tape and Reel", I/Os (High Current)=37, Operating Frequency(F) (Processor speed) (MHz)=72, Supply Voltage(Vcc) min (V)=2, A/D Converter="2x12-bit (10 Channel)", ComponentLink1Description="Manufacturer URL", ComponentLink1URL=http://www.st.com/web/en/home.html, ComponentLink2Description=Datasheet, ComponentLink2URL=http://www.st.com/st-web-ui/static/active/en/resource/technical/document/datasheet/CD00210843.pdf, ComponentLink3Description="Package Specification", ComponentLink3URL=http://www.st.com/st-web-ui/static/active/en/resource/technical/document/datasheet/DM00058181.pdf, Core="ARM Cortex-M3", DatasheetVersion="Rev. 6", FLASH Size (Prog) (kB)=32, Internal RAM Size (kB)=10, Mounting Technology="Surface Mount", PackageDescription="48-Pin Low Profile Quad Flat Package, 7 x 7 mm Body, 0.5 mm Pitch", PackageReference=LQFP48, PackageVersion="Rev. 6, 06/2013", Packing="Tape and Reel", PartNumber=STM32F103C6T7ATR
U6: library part CMP-0237-00046-3, "ARM Cortex-M3 32-bit MCU, 32 KB Flash, 10 KB Internal RAM, 37 I/Os, 48-pin UFQFPN, -40 to 85 degC, Tray", I/Os (High Current)=37, Operating Frequency(F) (Processor speed) (MHz)=72, Supply Voltage(Vcc) min (V)=2, A/D Converter="2x12-bit (10 Channel)", ComponentLink1Description="Manufacturer URL", ComponentLink1URL=http://www.st.com/web/en/home.html, ComponentLink2Description=Datasheet, ComponentLink2URL=http://www.st.com/st-web-ui/static/active/en/resource/technical/document/datasheet/CD00210843.pdf, ComponentLink3Description="Package Specification", ComponentLink3URL=http://www.st.com/st-web-ui/static/active/en/resource/technical/document/data_brief/DM00071938.pdf, Core="ARM Cortex-M3", DatasheetVersion="Rev. 6", FLASH Size (Prog) (kB)=32, Internal RAM Size (kB)=10, Mounting Technology="Surface Mount", PackageDescription="48-Pin Ultra Thin Fine Pitch Quad Flat No-Lead, 7 x 7 x 0.6 mm Body, 0.5 mm Pitch, Exposed Pad", PackageReference=UFQFPN48, PackageVersion="Rev. 1, 04/2013", Packing=Tray, PartNumber=STM32F103C6U6A
X1: library part CMP-2000-05034-1, "Microprocessor Crystal, 8 MHz, 18 PF, -40 to 85 degC, 2-Pin SMD, RoHS, Tape and Reel", ESR (Equivalent Series Resistance)=100Ohm, Frequency=8MHz, Frequency Stability=±30ppm, Frequency Tolerance=±20ppm, Load Capacitance=18pF, Manufacturer=Abracon, Operating Mode=Fundamental, Operating Temperature=-40degC~85degC, Package / Case=2-SMD, Package Description="2-Pin Surface Mount Device, Body 6 x 3.5 mm", Package Reference=ABM7, Standard Package=1,000, 3D Model="ABM7.pdf /  / ABM7.stp", Catalog Drawings="ABM7SeriesTop /  / ABM7SeriesSide /  / ABM7SeriesBottom", Category=CrystalsandOscillators, Datasheet URL=https://datasheet.ciiva.com/1357/1718755-1357277.pdf, Datasheet Version=Dec-17, Family=Crystals, Featured Product=ABM7andABM11Crystals, Height="0.055\"(1.40mm)", Manufacturer URL=http://www.abracon.com/, Mounting Type=SurfaceMount, Online Catalog=ABM7Series, Other Names="535-9831-2 / ABM7-8.000MHZ-D-2-Y-T / ABM78000MHZD2YT", Packaging=Tape&Reel(TR), RoHS Information=RoHS2/REACHCompliance, Series=ABM7, Size / Dimension="0.236\"Lx0.138\"W(6.00mmx3.50mm)", Type=MHzCrystal

## Via types
v1: diameter 23.62, hole 12, Top Layer to Bottom Layer, tented both sides, 58 vias
v2: diameter 19.68, hole 13, Top Layer to Bottom Layer, 25 vias
v3: diameter 39.37, hole 19.68, Top Layer to Bottom Layer, tented both sides, 15 vias
v4: diameter 40, hole 20, Top Layer to Bottom Layer, tented both sides, 4 vias
v5: diameter 23.62, hole 12, Top Layer to Bottom Layer, 1 vias

## Nets (pads, with @x,y where several pads share a name; then routed paths per layer and width w, separated by ;. In a path a pad name is that pad's centre, name@x,y a point inside that pad or via, vN(x,y) a via of type N, cw(c..) or ccw(c..) an arc to the next point about the centre after c; other vN are vias at no path point)
3V3_VREF: C14.1 R3.1 R6.2 U4.8 U4.10 | length 419
  Top Layer w15: U4.10 2527,3780.45 2527,3737 2543.62,3720.38 2626,3720.38 ; U4.8 2626,3720.38 ; R3.1@2802.01,3773.06 2797.08,3773.06 2750.27,3726.24 2750.27,3719.3 2744.97,3714 2740.05,3714 2736.86,3717.19 2687.19,3717.19 2684,3720.38 2626,3720.38
12V_VREF: C13.1 R22.1 R23.2 U4.4 U4.6 | length 432
  Top Layer w10: U4.4 2476,3604.7 2491.53,3620.23 2577.87,3620.23 ; U4.6 2576,3610.39 2581.86,3616.24 2577.87,3620.23 ; R22.1@2799.91,3620.89 R22.1 2799.91,3625.53 R23.2 2740.2,3625.53 2730.92,3616.24 C13.1 2678.02,3620.23 2581.86,3620.23 2577.87,3620.23
+3V3: C7.1 C8.1 C10.1 C11.1 C12.1 C15.1 C16.1 P1.3 R3.2 R4.2 R7.2 R12.2 U2.5 U3.5 U5.1 U5.9 U5.24 U5.36 U5.48 U6.1 U6.9 U6.24 U6.36 U6.48 | length 5752.7
  Top Layer w8: P1.3 3474.62,3888.62 3508.44,3888.62 3552,3845.06 v1(3552,3841.79) ; v1(3531.1,3743.57) 3542.69,3755.16 3545.38,3757.85 C12.1@3545.38,3775.05
  Top Layer w10: 2171.6,3041.11 2171.6,3042.2 ; C16.1@2177.75,3066.03 2177.75,3066.11 C16.1 ; v1(3101.53,3681.53) 3101.6,3681.45 3172.92,3681.45 C10.1 3182.76,3691.14 3192.51,3691.14 3207.18,3705.8 3234.61,3705.8 U5.24 ; C15.1 C15.1@3138.95,3403.38 ; C15.1@3137,3412.38 C15.1@3139.95,3412.38 ; v1(3211.96,3370.17) 3201.29,3380.84 3201.29,3381.81 3195.24,3387.87 3194.97,3387.87 3179.46,3403.38 C15.1@3138.95,3403.38 ; U6.36 U5.36 3211.77,3438.99 3174.57,3438.99 C15.1@3138.95,3403.38 ; U5.48 3519.04,3388.87 3563.62,3344.29 C11.1 ; U6.9 U5.9 3555.79,3596.55 3569.29,3610.06 C7.1 3554.48,3727.21 3554.48,3743.37 3545.38,3752.47 3545.38,3757.85 ; U5.1 3560.32,3439.07 3566.17,3433.21 3566.17,3351.17 C11.1@3561.46,3346.46 ; C12.1@3551.38,3784.34 3551.38,3786.95 3561.14,3796.72 3564.72,3796.72 3593.33,3825.33 R12.2
  Top Layer w15: C8.1 2691.95,3451.62 2738.99,3498.66 2738.99,3499.69 2743.3,3504 U2.5 2860,3504 2911.09,3555.09 ; 2910.59,3555.59 2959,3604 v1(2959,3645.19) ; 2911.59,3444.41 2911.59,3554.59
  Top Layer w20: U3.5 2171.6,3041.11 ; 2171.6,3042.2 cw(c2220.77,3042.2) C16.1@2177.75,3066.03 ; C16.1 2186,3079.03 2112.63,3152.4 2112.63,3554.18 2121.43,3562.97 2121.43,3854.89 2147.62,3881.08 2823.3,3881.08 2880.14,3824.24 2880.14,3821.83 v1(2915.57,3786.4) ; v1(2195,3556.19) 2195,3557.17 2206.15,3568.32 2206.15,3593.2 R7.2 R4.2 ; R3.2 2858.7,3715.47 2870.36,3703.81 v1(2871.34,3703.81) ; 2911.59,3444.41 2911.59,3348.41 3032.71,3227.29 3204,3227.29 3493.29,3227.29 3563.62,3297.62 C11.1
  Bottom Layer w8: v1(3531.1,3743.57) 3552,3764.47 v1(3552,3841.79)
  Bottom Layer w10: v1(2959,3645.19) 2982.78,3621.41 3005.41,3621.41 3012.5,3628.5 3012.5,3673.03 3020.47,3681 3101,3681 v1(3101.53,3681.53) ; v1(3204,3225.48) 3206.61,3228.09 3206.61,3246.61 3228,3268 3228,3354.13 v1(3211.96,3370.17)
  Bottom Layer w15: v1(2871.34,3703.81) 2871.34,3742.18 v1(2915.57,3786.4) ; v1(3211.96,3370.17) 3211.96,3372.51 3227.15,3387.7 3227.15,3420.91 3211.85,3436.21 3211.85,3597.85 3357.57,3743.57 v1(3531.1,3743.57)
  Bottom Layer w20: v1(2121.43,3563.95) 2186.26,3563.95 2194.02,3556.19 v1(2195,3556.19) ; v1(2871.34,3703.81) 2872.04,3703.12 2901.07,3703.12 v1(2959,3645.19)
+5V0: C2.1 C9.1 D2.1 U1.3 U2.3 | length 2743.5
  Top Layer w15: 2146.87,3212.26 2135.13,3223.99 2135.13,3527.06 2149,3540.93 2149,3846.5 2161,3858.5 2811.5,3858.5 2893.26,3776.74 2893.26,3758.71 2907.5,3744.46 2911.26,3744.46 2917.93,3737.8 v1(2920.26,3737.8) ; v1(2990.69,3645.19) 2992.34,3643.54 2992.34,3624.04 2998,3618.38 2998,3590 2931.59,3523.59 2931.59,3487.01 2938.91,3479.69 3026,3479.69 3034.78,3470.9 3034.78,3458.89 3042.05,3451.62 C9.1
  Top Layer w20: 2146.87,3212.26 2192.87,3166.26 2247.87,3166.26 2281,3133.12 2281,2923.5 2278.99,2921.49 v1(2278.99,2873.61) 2278.3,2872.92 2274.83,2872.92 2240,2838.09 U1.3 ; U2.3 2975.79,3452.81 3034.78,3452.81 C9.1@3044.81,3452.81
  Top Layer w30: C2.1@2183.65,2747 2235.31,2747 2240,2751.69 U1.3
  Bottom Layer w15: v1(2920.26,3737.8) 2957.8,3700.26 2957.8,3682.73 2983.31,3657.22 2983.31,3654.9 2990.69,3647.52 v1(2990.69,3645.19)
  Bottom Layer w20: D2.1 2206,2803.07 2275.85,2872.92 2278.3,2872.92 v1(2278.99,2873.61)
+12V0: C1.1 C4.1 F1.2 R1.2 R2.2 R5.2 R8.2 R22.2 U1.1 U4.3 | length 2512.3
  Top Layer w10: 2267,3190 2286.37,3209.37 2286.37,3266.63 2261,3292 2205,3292 2187.63,3309.37 2187.63,3363.79 2203.37,3379.53 2278.53,3379.53 2426,3527 2426,3558 2428.19,3558 2451.05,3535.14 2495.14,3535.14 2501,3541 2501,3599.37 2506.86,3605.23 2546.14,3605.23 2552,3599.37 2552,3526.75 2582,3496.75 2617.31,3496.75 R2.2 2624.92,3494.06 2632.72,3501.85 2632.72,3504.14 2638.57,3510 2690.03,3510 2713.02,3532.98 2764.41,3532.98 2797.9,3566.47 R22.2 R5.2
  Top Layer w15: R8.2@2205,3706.99 2205,3755.52 R1.2@2205.47,3755.99 ; R8.2@2207.47,3706.99 2207.47,3700.6 2169,3662.13 2169,3456.43 2155.13,3442.56 2155.13,3236.87 2202,3190 2267,3190 2311.51,3145.49 2311.51,3090.54 F1.2
  Top Layer w30: F1.2 2357.9,3044.15 2357.9,2969.57 2375.47,2952 2445.77,2952 2460.49,2937.27 2460.49,2892.53 2478.3,2874.72 2509.76,2874.72 C1.1@2510,2874.48 ; U1.1 2444.69,2795.53 2444.69,2798 2492.43,2798 2510,2815.57 C1.1@2510,2874.48 ; C1.1 C1.1@2510,2874.48
+B_BACKUP: J1.10 J2.10 | length 850.9
  Top Layer w50: J1.10 3564.69,2995.08 3688,2871.77 3688,2418 3595,2325 3595,2324.39 3570.11,2299.49 J2.10
ACC_CAN_H: J1.7 J2.7 | length 756.6
  Top Layer w15: J1.7@3297.18,2989 3297.18,2946.55 3297,2946.37 3297,2933 3310.26,2919.74 J2.7 ; J1.7 3304.85,2989.15 J1.7@3305,2989
ACC_CAN_L: J1.18 J2.18 | length 759.7
  Top Layer w15: J1.18 3340.08,3148.82 3340.08,3089.92 3348,3082 3348,2411.09 J2.18
BLUE_LED: R10.1 U5.25 U6.25 | length 328
  Top Layer w10: R10.1 3123.06,3807.47 3112.31,3796.72 3112.31,3763.53 3066,3717.21 3066,3686.21 3096.21,3656 3186.02,3656 3186.42,3655.61 U6.25
BOOT0: R11.2 U5.44 U6.44 | length 170.1
  Top Layer w10: R11.2@3313.34,3290 3373.72,3290 3399.84,3316.12 U5.44
CAN1_RX: U2.4 U5.45 U6.45 | length 784.6
  Top Layer w10: U2.4 3040,3504 3067.04,3476.96 3067.04,3476.21 3072.72,3470.53 3072.72,3270.86 3081.28,3262.29 3411.96,3262.29 3419.53,3269.86 U5.45
CAN1_TX: U2.1 U5.46 U6.46 | length 654.8
  Top Layer w10: U2.1 2993.3,3354 3036.24,3311.06 3036.24,3286.12 3075.07,3247.29 3421.83,3247.29 3439,3264.46 3439,3363.23 3439.21,3363.44 U5.46
EPS_TO_LKAS_RX: J1.12 SW1.C2 | length 364.2
  Top Layer w15: SW1.C2 2652.96,3339.88 2812.72,3180.12 J1.12
EPS_TO_LKAS_TX: J2.12 R2.1 SW1.2B U4.5 | length 1517.1
  Top Layer w10: SW1.2B 2540.77,3437.44 2617.56,3437.44 R2.1
  Top Layer w15: U4.5 2527,3571 2527,3527 2538.32,3515.68 SW1.2B 2529.9,3431.45 2497.45,3431.45 2459,3393 2459,3239 2509,3189 2602.28,3189 2720,3071.28 2720,2932 2833.88,2818.12 J2.12
EPS_TO_LKAS_TX1: R1.1 SW1.2A U4.14 | length 419.9
  Top Layer w8: SW1.2A@2231,3446 2229,3448 2229,3572.82 2231,3574.82 2231,3739
  Top Layer w10: SW1.2A@2231,3446 SW1.2A ; 2231,3739 2246.06,3754.06 2260.2,3754.06 2260.2,3761.26 2280.39,3781.45 U4.14
F_CAN_H: J1.2 J2.2 U2.7 | length 1213
  Top Layer w15: U2.7@2751.7,3404 2755.7,3400 2798,3400 2855,3343 2855,3097 2864.1,3087.9 2864.1,3026.38 2874.48,3015.99 2874.48,2270.43 J2.2
F_CAN_L: J1.13 J2.13 U2.6 | length 1125.1
  Top Layer w15: U2.6 2780.7,3454 2785.01,3449.69 2785.01,3445.99 2878,3353 2878,3286.49 2899.33,3265.16 2899.33,3122.02 2916,3105.35 2916,2410.02 J2.13
GND: C1.2 C2.2 C3.2 C4.2 C5.2 C6.2 C7.2 C8.2 C9.2 C10.2 C11.2 C12.2 C13.2 C14.2 C15.2 C16.2 J1.14 J2.14 J3.5 LED1.1 LED2.1 P1.5 P1.7 P1.11 R6.1 R11.1 R13.2 R23.1 U1.2 U1.4 U2.2 U2.8 U3.2 U4.12 U5.8 U5.23 U5.35 U5.47 U6.8 U6.23 U6.35 U6.47 U6.49 | length 5252.1
  Top Layer w5: C3.2@2130.5,2807 C3.2@2132.5,2805 ; v1(2132.5,2687) C3.2@2132.5,2805 ; C2.2@2132.5,2747 C3.2@2132.5,2805 ; v1(2181,2685.22) 2189.03,2685.22 2190.81,2687 2228.81,2649 2234,2649 2229.5,2653.5 v1(2229.5,2687) ; U1.4@2221.15,2252.81 U1.4@2388.65,2252.81 ; v3(2227,2269) 2235.48,2269 U1.4 ; v3(2243,2430) U1.4@2299.48,2373.52 ; U1.4@2297.89,2331.41 U1.4 ; U1.4@2299.48,2329.81 U1.4@2340,2329.81 ; U1.4@2305.5,2270 U1.4@2374.51,2339.01 ; U1.4@2324.99,2358.51 U1.4 ; v3(2404.5,2269) 2404.5,2309.02 U1.4@2374.51,2339.01 ; v3(2445,2430) 2396.48,2430 U1.4 ; U1.4@2455.25,2419.75 U1.4@2515.5,2480 ; v1(2467.5,2678.22) 2475.53,2678.22 2477.31,2680 2515.31,2642 2520.5,2642 2516,2646.5 v1(2516,2680) ; U1.4@2512,2349 v3(2514,2347) ; U1.4@2514,2349 U1.4@2524,2339 ; U1.4@2524,2349 U1.4@2524,2339 ; 2589,2349 2635,2303 v3(2635,2292) ; 2589,2350 v3(2635,2350) U1.4@2514,2350 ; v3(2635,2228) 2583,2280 2548.13,2280 2524,2304.13 U1.4@2524,2339 ; v3(2635,2480) U1.4@2515.5,2480 ; U1.4 U1.4@2409.02,2373.52 ; U1.4 U1.4@2374.51,2339.01 ; U1.4@2374.51,2339.01 U1.4@2384.5,2349 ; U1.4@2384.5,2349 U1.4@2409.02,2373.52 ; U1.4@2384.5,2349 2385.5,2350 U1.4@2514,2350 ; U1.4@2409.02,2373.52 2477.48,2373.52 U1.4@2509,2342 ; U1.4@2409.02,2373.52 U1.4@2515.5,2480 ; U1.4@2509,2342 2501,2350 U1.4@2514,2350 ; U1.4@2509,2342 2509,2308.13 2548.13,2269 v3(2582,2269) 2582,2281 U1.4@2524,2339
  Top Layer w8: P1.11 3274.62,3888.62 3319.38,3888.62 P1.7 P1.5 3437.62,3901.62 3562.38,3901.62 v1(3593,3871)
  Top Layer w10: C4.2 2553.23,2872 2555.91,2869.33 2555.91,2815.9 v1(2554.57,2814.57) ; LED1.1@2972.97,3790.66 2973.03,3790.6 v1(2973.03,3753) ; v1(3059,3742) 3059,3776.95 LED2.1@3071.71,3789.66 ; v1(3125.92,3725.08) 3127.69,3726.85 3174.18,3726.85 3185.72,3738.39 3202.79,3738.39 3210.72,3746.31 3268.23,3746.31 3281.73,3732.81 U5.23 ; C15.2@3137,3459.62 3137.87,3458.76 U5.35 v5(3281.73,3458.76) ; v1(3203.02,3285.81) 3234.68,3285.81 3235.28,3285.21 3235.28,3284.81 R11.1@3242.47,3292.01 ; U5.47 3458.98,3388.8 3458.98,3352.36 3470,3341.34 C11.2 3516.38,3292.38 v1(3494,3270) ; U5.8 3572.29,3576.87 3584.29,3588.87 3584.29,3673.21 3605.78,3694.7 3605.78,3707.47 3614.65,3716.34 3614.65,3717.37 3592.62,3739.39 3592.62,3750.79 ; C12.2@3592.62,3784.34 3592.62,3750.79 ; v1(3626.65,3765.98) 3622.97,3765.98 3607.77,3750.79 3592.62,3750.79 ; v1(3637.46,3342) 3640.06,3344.61 3640.06,3355.43 3666,3381.37 C5.2 ; v1(3669.38,3781.29) 3669.38,3764.24 3683.08,3750.54 C6.2
  Top Layer w15: C2.2@2134.36,2747.01 2134.36,2814.99 C3.2@2134.36,2807 ; C3.2@2134.38,2815 2134.38,2939.5 2147.27,2952.39 2202.92,2952.39 ; v4(2234,3128) 2234.65,3127.35 2234.65,3078.65 C16.2 ; U1.2 2340.5,2791.34 2340.5,2897.5 v4(2343,2900) ; U4.12 2426,3822 2431,3827 v1(2431,3829) ; v1(2680.96,3539.64) 2681.48,3540.15 2681.48,3568.48 C13.2 2734.91,3569 2737.98,3565.93 R23.1@2737.98,3564.94 ; v1(2681,3794.19) 2681,3766.62 C14.2 ; C14.2@2684,3767.62 2684,3773.06 R6.1@2740.05,3773.06 ; v1(2688,3372) 2688.5,3372.5 2688.5,3403.88 C8.2 2691.95,3404.38 2738.02,3358.31 2747.39,3358.31 U2.8@2751.7,3354 ; U2.2@2964.49,3404.19 3044.81,3404.19 3045.11,3403.89 3045.11,3375.93 v1(3045.23,3375.81)
  Top Layer w20: U3.2 2209,2945.22 ; v1(3593,3871) 3593.69,3871.69 3630.68,3871.69 3633.47,3874.49 R13.2
  other v1: 2458.5,2602 2513.5,2602 2568.5,2602 2172,2609 2227,2609 2282,2609 2437.5,2640 2490,2640 2542.5,2640 2151,2647 2203.5,2647 2256,2647 2419,2680 2123.65,2953.35
  other v2: 3283.7,3460.72 3327.01,3460.72 3370.31,3460.72 3413.62,3460.72 3456.93,3460.72 3283.7,3504.03 3327.01,3504.03 3370.31,3504.03 3413.62,3504.03 3456.93,3504.03 3283.7,3547.34 3327.01,3547.34 3370.31,3547.34 3413.62,3547.34 3456.93,3547.34 3283.7,3590.65 3327.01,3590.65 3370.31,3590.65 3413.62,3590.65 3456.93,3590.65 3283.7,3633.95 3327.01,3633.95 3370.31,3633.95 3413.62,3633.95 3456.93,3633.95
  other v3: 2159,2347 2336.5,2347 2159,2508 2336.5,2508 2514,2508
IGN1: F1.1 J1.19 J2.19 | length 1601.8
  Top Layer w25: F1.1 2544.95,3036.03 2631,2949.98 2631,2598 2694,2535 2694,2329.61 2698.13,2325.48 2698.13,2314.87 v4(2701,2312)
  Bottom Layer w20: v4(2701,2312) 2704.83,2315.83 2754.87,2315.83 2772.95,2333.9 3382.69,2333.9 3440.18,2391.4 J2.19
LDW_OFF_IND: J1.11 J2.11 | length 850.3
  Top Layer w20: v4(2660.86,3047.97) 2660.86,2919.14 2791.38,2788.62 2791.38,2559.38 2747.27,2515.27 J2.11
  Bottom Layer w20: v4(2660.86,3047.97) 2664.68,3051.8 2664.68,3071.45 2726.11,3132.88 J1.11
LDW_OFF_SW: J1.8 J2.8 | length 753.2
  Top Layer w15: J1.8 3391.46,2502.54 3396.88,2497.12 J2.8
LKAS_TO_EPS_RX: J2.1 SW1.C1 | length 1429.8
  Top Layer w15: SW1.C1 2329.72,3340 2501.72,3168 2595,3168 2693.36,3069.64 2693.36,2924.64 2813.88,2804.12 2813.88,2501.88 2790.58,2478.58 J2.1
LKAS_TO_EPS_TX: J1.1 R5.1 SW1.1B U4.7 | length 1222.8
  Top Layer w7: U4.7 2626,3579.89 2633.92,3587.81 2643.82,3587.81 2648.99,3592.98 2703.24,3592.98 2706.26,3596 2784,3596
  Top Layer w10: 2784,3596 2825.09,3596 2853.09,3624 R5.1@2858.01,3624
  Top Layer w15: U4.7 2626,3560.19 2646.35,3539.84 2646.35,3536.65 v1(2648,3535) ; v1(2664,3485) 2664,3482.67 2658,3476.67 2658,3397.79 2649.21,3389 2503,3389 2481,3367 2481,3299.29 2538.32,3241.96 SW1.1B 2723,3239.88 2769,3193.89 2769,3119.95 2777.49,3111.46 2777.49,3026.38 J1.1
  Bottom Layer w15: v1(2648,3535) 2648,3532.67 2664,3516.67 v1(2664,3485)
LKAS_TO_EPS_TX1: R8.1 SW1.1A U4.13 | length 778.8
  Top Layer w8: 2243,3522 2243,3568.43 2246.2,3571.64 2246.2,3680.28 2266.53,3700.6 R8.1@2266.53,3711.91
  Top Layer w10: SW1.1A 2227.5,3240 2172.63,3294.87 2172.63,3370 2194,3391.37 2194,3394.53 2269.43,3394.53 2299,3424.1 2299,3466 2243,3522 ; R8.1@2266.53,3711.91 2274.32,3719.71 2326.07,3719.71 2376,3769.64 U4.13
NetC3_1: C3.1 D1.2 D2.2 U3.1 U3.3 | length 414.1
  Top Layer w20: U3.1 2173,2906.42 2173,2876 2182.65,2866.35 ; C3.1 2182.65,2866.35 ; v1(2205.36,2866.35) v1@2206.34,2866.35 ; U3.3 2243.41,2904.83 2243.41,2885.34 2231.21,2873.13 2213.12,2873.13 v1@2206.34,2866.35 ; 2182.65,2866.35 v1@2206.34,2866.35
  Bottom Layer w20: v1(2205.36,2866.35) 2205.36,2954.01 D2.2 ; D2.2@2206,2981.65 2339,2981.65 D1.2
NetLED1_2: LED1.2 R9.2 | length 55.1
  Top Layer w15: LED1.2@2977,3873.34 2980.14,3870.2 3020.8,3870.2 R9.2@3022,3869 ; R9.2@3026.09,3869.91 R9.2@3032,3864
NetLED2_2: LED2.2 R10.2 | length 54.5
  Top Layer w10: LED2.2@3085,3875.34 3095.81,3864.53 R10.2@3135,3864.53
NRST: P1.12 R12.1 U5.7 U6.7 | length 895.1
  Top Layer w8: v1(3322,3785.89) 3326.19,3785.89 3335.08,3777 3514.95,3777 3527.61,3789.67 3527.61,3805.44 3532.89,3810.72 3550.81,3810.72 3590.28,3850.19 3615.09,3850.19 3616.95,3852.05 3670.73,3852.05 3692.53,3830.25 R12.1 ; U5.7 3579.49,3557.18 3599.82,3577.51 3599.82,3666.53 3605.68,3672.39 3625.5,3672.39 3648.57,3695.45 3648.57,3789.91 3670.27,3811.62 3683.73,3811.62 3688.63,3816.51 R12.1@3688.63,3818.51
  Bottom Layer w8: P1.12@3247,3814 3279,3782 3294.19,3782 3295.57,3783.38 3319.49,3783.38 v1(3322,3785.89)
OSC_IN: C5.1 U5.5 U6.5 X1.2 | length 254.6
  Top Layer w10: U5.5 3624.95,3517.81 3643.6,3499.17 3643.6,3455.74 3644,3455.34 3641.32,3455.34 3608.91,3422.94 C5.1
OSC_OUT: C6.1 U5.6 U6.6 X1.1 | length 299.9
  Top Layer w10: U6.6 3621.83,3537.5 3644,3559.67 X1.1@3644,3624.98 ; X1.1@3660,3624.98 3660.6,3624.98 3693,3657.39 C6.1@3693,3700.51
PA0: U5.10 U6.10
PA1: U5.11 U6.11
PA4: U5.14 U6.14